# Altium PCB 9.7-13.3.PcbDoc
Units mil, origin at the board's own origin, x right, y up, seen from the top; angles counter-clockwise.
Board outline 796.03 x 891.03 mil, 2 copper layers (Top Layer, Bottom Layer); 2 components, 23 nets, 76 pads, 52 vias.
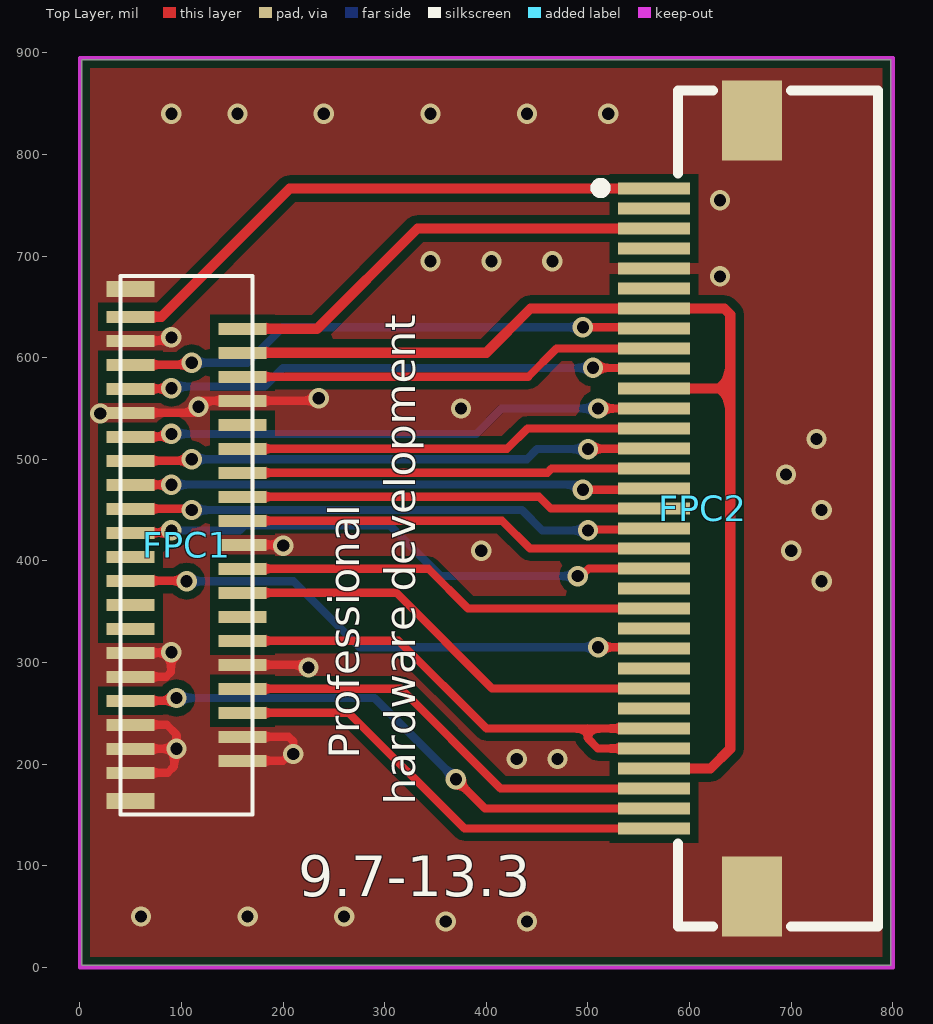
[diagram p0: Top Layer view]
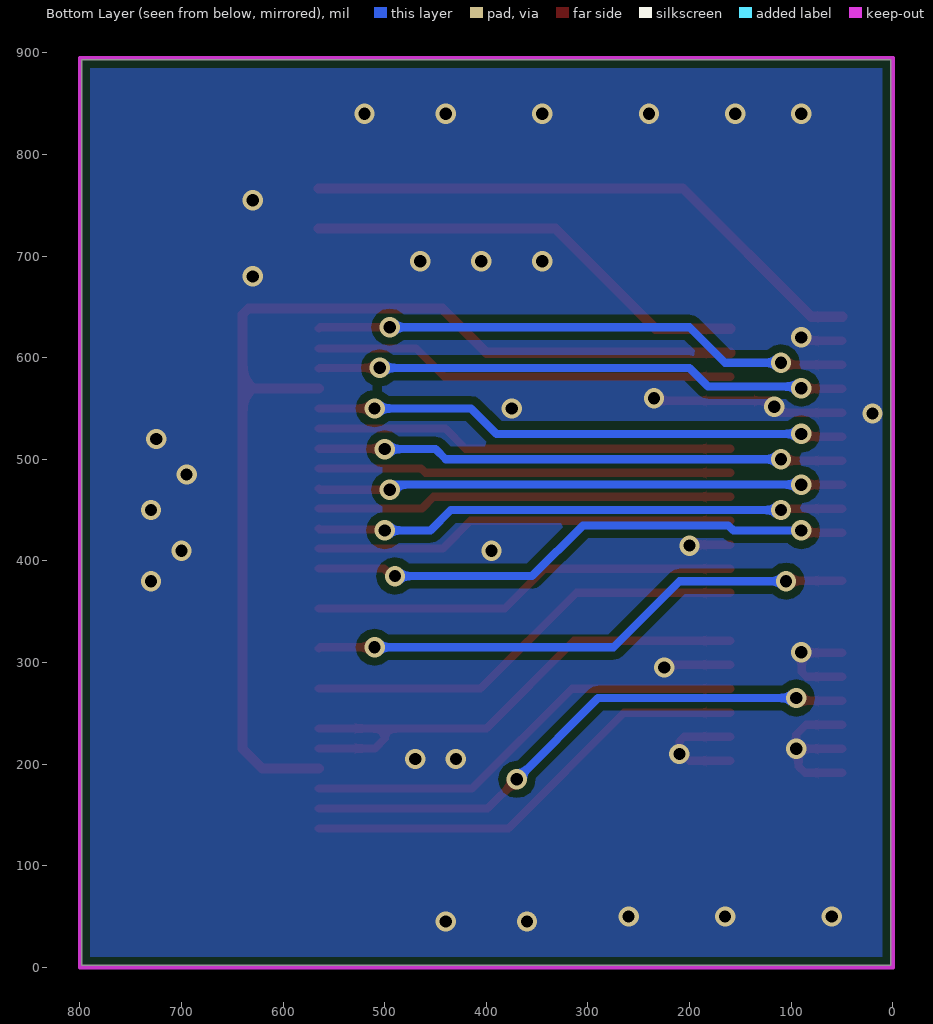
[diagram p1: Bottom Layer view, seen from below]

## Layer stack, top to bottom
Top Solder: solder mask 0.4, Solder Resist, Dk 3.5
Top Layer: signal copper 1.4
Dielectric 1: dielectric 12.6, FR-4, Dk 4.8
Bottom Layer: signal copper 1.4
Bottom Solder: solder mask 0.4, Solder Resist, Dk 3.5

## Board outline
1.98,1.98 1.98,893.02 798.02,893.02 1.98,893.02 798.02,893.02 798.02,1.98

## Design rules (kind name [scope] priority, off if disabled: settings)
Clearance [All] p1: gap=8 ignorepadtopadclearanceinfootprint=FALSE
PolygonConnect [All] p1: connectstyle=Direct reliefconductorwidth=10 reliefentries=4 polygonreliefangle="90 Angle" airgapwidth=10
RoutingVias [All] p1: holewidth=28 width=50 viastyle="Through Hole" minholewidth=28 minwidth=50 maxholewidth=28 maxwidth=50
SolderMaskExpansion [All] p1: expansion=4
Width [All] p1: maxlimit=20 minlimit=6 preferedwidth=10
30 further rules are at their usual default settings.

## Components (designator, comment, footprint, x,y, rotation, side; value= is the part's Value field where it differs from the comment)
FPC1 "39" 1 104.88,415.87 r270 top
FPC2 "Header 30" 2 613.23,451.57 r90 top

## Footprints (in the part's own frame and the unit in brackets; to place one, negate y for a bottom-side part, rotate by r counter-clockwise, add the part's x,y. Pads: shape width x height; smd on the part's side, far side on the other; paste and mask are expansions set on the pad)
1 [mm]
  rect 0.4x1.2 smd: 0(-6.4,-1.4) 0(6.4,-1.4)
  rect 0.3x1.2 smd: 1(-5.7,-1.4) 2(-5.4,1.4) 3(-5.1,-1.4) 4(-4.8,1.4) 5(-4.5,-1.4) 6(-4.2,1.4) 7(-3.9,-1.4) 8(-3.6,1.4) 9(-3.3,-1.4) 10(-3,1.4) 11(-2.7,-1.4) 12(-2.4,1.4) 13(-2.1,-1.4) 14(-1.8,1.4) 15(-1.5,-1.4) 16(-1.2,1.4) 17(-0.9,-1.4) 18(-0.6,1.4) 19(-0.3,-1.4) 20(0,1.4) 21(0.3,-1.4) 22(0.6,1.4) 23(0.9,-1.4) 24(1.2,1.4) 25(1.5,-1.4) 26(1.8,1.4) 27(2.1,-1.4) 28(2.4,1.4) 29(2.7,-1.4) 30(3,1.4) 31(3.3,-1.4) 32(3.6,1.4) 33(3.9,-1.4) 34(4.2,1.4) 35(4.5,-1.4) 36(4.8,1.4) 37(5.1,-1.4) 38(5.4,1.4) 39(5.7,-1.4)
  silkscreen extent -6.72,-1.65 6.75,1.65
2 [mm]
  rect 0.3x1.8 smd mask+0.051: 1(8,1.225) 2(7.5,1.225) 3(7,1.225) 4(6.5,1.225) 5(6,1.225) 6(5.5,1.225) 7(5,1.225) 8(4.5,1.225) 9(4,1.225) 10(3.5,1.225) 11(3,1.225) 12(2.5,1.225) 13(2,1.225) 14(1.5,1.225) 15(1,1.225) 16(0.5,1.225) 17(0,1.225) 18(-0.5,1.225) 19(-1,1.225) 20(-1.5,1.225) 21(-2,1.225) 22(-2.5,1.225) 23(-3,1.225) 24(-3.5,1.225) 25(-4,1.225) 26(-4.5,1.225) 27(-5,1.225) 28(-5.5,1.225) 29(-6,1.225) 30(-6.5,1.225) 31(-7,1.225) 32(-7.5,1.225) 33(-8,1.225)
  rect 2x1.5 smd mask+0.051: 34(-9.7,-1.225) 35(9.7,-1.225)
  silkscreen extent -10.45,-4.38 10.45,2.69

## Part data
FPC2: library part "Header 33", "Header, 30-Pin", LatestRevisionDate=17-Jul-2002, LatestRevisionNote="Re-released for DXP Platform.", Publisher="Altium Limited"

## Via types
v1: diameter 20, hole 12, Top Layer to Bottom Layer, tented both sides, 52 vias

## Nets (pads, with @x,y where several pads share a name; then routed paths per layer and width w, separated by ;. In a path a pad name is that pad's centre, name@x,y a point inside that pad or via, vN(x,y) a via of type N, cw(c..) or ccw(c..) an arc to the next point about the centre after c; other vN are vias at no path point)
BORDER: FPC1.34 FPC2.33 | length 452.2
  Top Layer w8: FPC1.34 264.49,250.51 378.38,136.62 FPC2.33
CKV: FPC1.33 FPC2.32 | length 561.4
  Top Layer w8: FPC1.33 92.32,262.32 v1(95,265) ; v1(370,185) 398.7,156.3 FPC2.32
  Bottom Layer w8: v1(95,265) 290,265 v1(370,185)
D0: FPC1.12 FPC2.13 | length 413.3
  Top Layer w8: FPC1.12 420.35,510.35 440.32,530.32 FPC2.13
D1: FPC1.13 FPC2.14 | length 520.2
  Top Layer w8: FPC1.13 108.54,498.54 v1(110,500) ; v1(500,510) 500.31,510.32 564.69,510.32 FPC2.14
  Bottom Layer w8: v1(110,500) 440,500 450,510 v1(500,510)
D2: FPC1.14 FPC2.15 | length 406.7
  Top Layer w8: FPC1.14 460,486.73 464.22,490.95 FPC2.15
D3: FPC1.15 FPC2.16 | length 517.9
  Top Layer w8: FPC1.15 89.92,474.92 v1(90,475) ; v1(495,470) 563.74,470 FPC2.16
  Bottom Layer w8: v1(90,475) 490,475 v1(495,470)
D4: FPC1.16 FPC2.17 | length 409.8
  Top Layer w8: FPC1.16 451.89,463.11 463.42,451.58 FPC2.17
D5: FPC1.17 FPC2.18 | length 524.8
  Top Layer w8: FPC1.17 108.7,451.3 v1(110,450) ; v1(500,430) 500.94,430.94 564.06,430.94 FPC2.18
  Bottom Layer w8: v1(110,450) 435,450 455,430 v1(500,430)
D6: FPC1.18 FPC2.19 | length 416.3
  Top Layer w8: FPC1.18 415.51,439.49 442.79,412.21 FPC2.19
D7: FPC1.19 FPC2.20 | length 542.1
  Top Layer w8: FPC1.19 87.68,427.68 v1(90,430) ; v1(490,385) 493.25,385 500.77,392.52 FPC2.20
  Bottom Layer w8: v1(90,430) 156.91,430 161.91,435 305,435 355,385 v1(490,385)
MODE1: FPC1.28 FPC2.28 FPC2.29 | length 519.8
  Top Layer w8: FPC1.28 313.62,321.38 399.96,235.04 500,235.04 ; FPC2.29 509.64,215.36 500,225 500,235.04 ; FPC2.28 500,235.04
SPV: FPC1.32 FPC2.31 | length 445.7
  Top Layer w8: FPC1.32 315.87,274.13 414.01,175.99 FPC2.31
VCOM: FPC1.22 FPC2.22 | length 421.2
  Top Layer w8: FPC1.22 342.76,392.24 381.85,353.15 FPC2.22
VDD: FPC1.4 FPC2.7 FPC2.11 FPC2.30 | length 1104.9
  Top Layer w10: FPC1.4 399.84,604.84 443.42,648.42 FPC2.7 634.14,648.42 640,642.56 640,580 ; FPC2.30 620.67,195.67 640,215 640,580 ; FPC2.11 629.68,569.68 640,580 ; 629.68,570.32 640,560
VGH: FPC1.23 FPC2.24 | length 542.8
  Top Layer w8: FPC1.23 104.57,380.43 v1(105,380) ; v1(510,315) 563.78,315 FPC2.24
  Bottom Layer w8: v1(105,380) 210,380 275,315 v1(510,315)
VGL: FPC1.24 FPC2.26 | length 444
  Top Layer w8: FPC1.24 311.38,368.62 405.59,274.41 FPC2.26
VNEG: FPC1.1 FPC2.1 | length 567.5
  Top Layer w10: FPC1.1 80.27,640.28 206.53,766.53 FPC2.1
VPOS: FPC1.2 FPC2.3 | length 445.9
  Top Layer w10: FPC1.2 233.46,628.46 332.16,727.16 FPC2.3
VSS: FPC1.0 FPC1.3 FPC1.8 FPC1.9 FPC1.20 FPC1.29 FPC1.30 FPC1.31 FPC1.35 FPC1.36 FPC1.37 FPC1.38 FPC1.39 FPC2.5 FPC2.34 FPC2.35 | length 729
  Top Layer w8: FPC1.39 86.46,191.46 92.7,197.7 92.7,212.7 v1(95,215) ; FPC1.37 49.8,215.04 v1(95,215) v1(95,215) ; FPC1.35 85.39,238.7 95,229.09 v1(95,215) ; FPC1.31 84.88,285.94 89.57,290.63 89.57,309.57 FPC1.29 ; FPC1.9 110.79,545.79 122.6,557.6 FPC1.8 232.6,557.6 v1(235,560) ; FPC1.3 86.65,616.65 v1(90,620) ; FPC1.38 200.02,203.27 206.75,210 v1(210,210) 210,222.2 205.31,226.89 FPC1.36 ; FPC1.30 222.24,297.76 v1(225,295) ; FPC1.20 199.13,415.87 v1(200,415)
  other v1: 360,45 440,45 60,50 165,50 260,50 430,205 470,205 90,310 730,380 395,410 700,410 730,450 695,485 725,520 20,545 375,550 116.69,551.69 630,680 345,695 405,695 465,695 630,755 90,840 155,840 240,840 345,840 440,840 520,840
XCL: FPC1.5 FPC2.8 | length 531.1
  Top Layer w8: FPC1.5 108.03,593.03 v1(110,595) ; v1(495,630) 563.74,630 FPC2.8
  Bottom Layer w8: v1(110,595) 165,595 200,630 v1(495,630)
XLE: FPC1.6 FPC2.9 | length 416.5
  Top Layer w8: FPC1.6 441.22,581.22 469.05,609.05 FPC2.9
XOE: FPC1.7 FPC2.10 | length 524
  Top Layer w8: FPC1.7 89.41,569.41 v1(90,570) ; v1(505,590) 564.37,590 FPC2.10
  Bottom Layer w8: v1(90,570) 91.69,571.69 181.69,571.69 200,590 v1(505,590)
XSTL: FPC1.11 FPC2.12 | length 526.5
  Top Layer w8: FPC1.11 87.84,522.16 v1@90,520 ; v1(510,550) FPC2.12
  Bottom Layer w8: v1(90,525) 390,525 415,550 v1(510,550)
pads on no net: FPC1.10 FPC1.21 FPC1.25 FPC1.26 FPC1.27 FPC2.2 FPC2.4 FPC2.6 FPC2.21 FPC2.23 FPC2.25 FPC2.27

## Polygon pours and split planes (outlines as drawn)
VSS on Top Layer "VSS_L01_P000" (solid, remove dead copper, pour order 0): -45,1010 60,905 1185,905 1185,220 740,-225 715,-200 -315,-200
VSS on Bottom Layer "VSS_L02_P002" (solid, remove dead copper, pour order 2): -80,975 -70,965 920,965 920,-45 810,-155 -75,-155

## Keep-outs
Keep-Out Layer:
  lines w3.94: 0,0 0,895 800,895 800,0 0,0

## Silkscreen, mask and mechanical layers (free items; w line width, h text height)
Top Overlay:
  text "Professional" at 275,205 h30 r90
  text "hardware development" at 330,160 h30 r90
  text "9.7-13.3" at 215,70 h40
Mechanical 1:
  lines w3.94: 0,895 800,895 800,0 0,0 0,895 ; 0,895 0,895